# Altium PCB stm32f103.PcbDoc
Units mm, origin at the board's own origin, x right, y up, seen from the top; angles counter-clockwise.
Board outline 53.38 x 22.71 mm, 2 copper layers (Top Layer, Bottom Layer); 35 components, 50 nets, 173 pads, 37 vias.
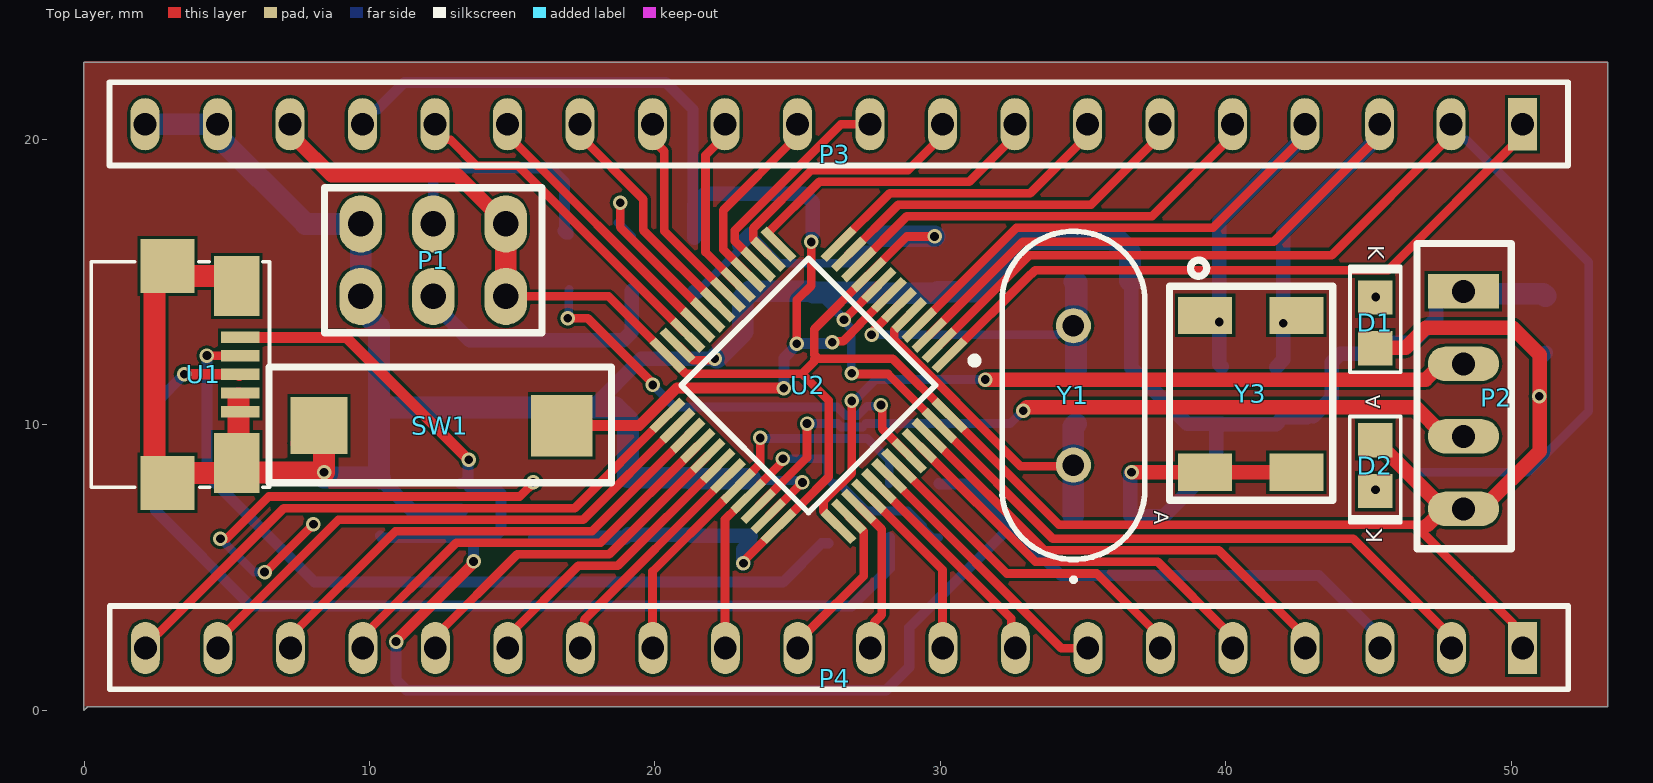
[diagram p0: Top Layer view]
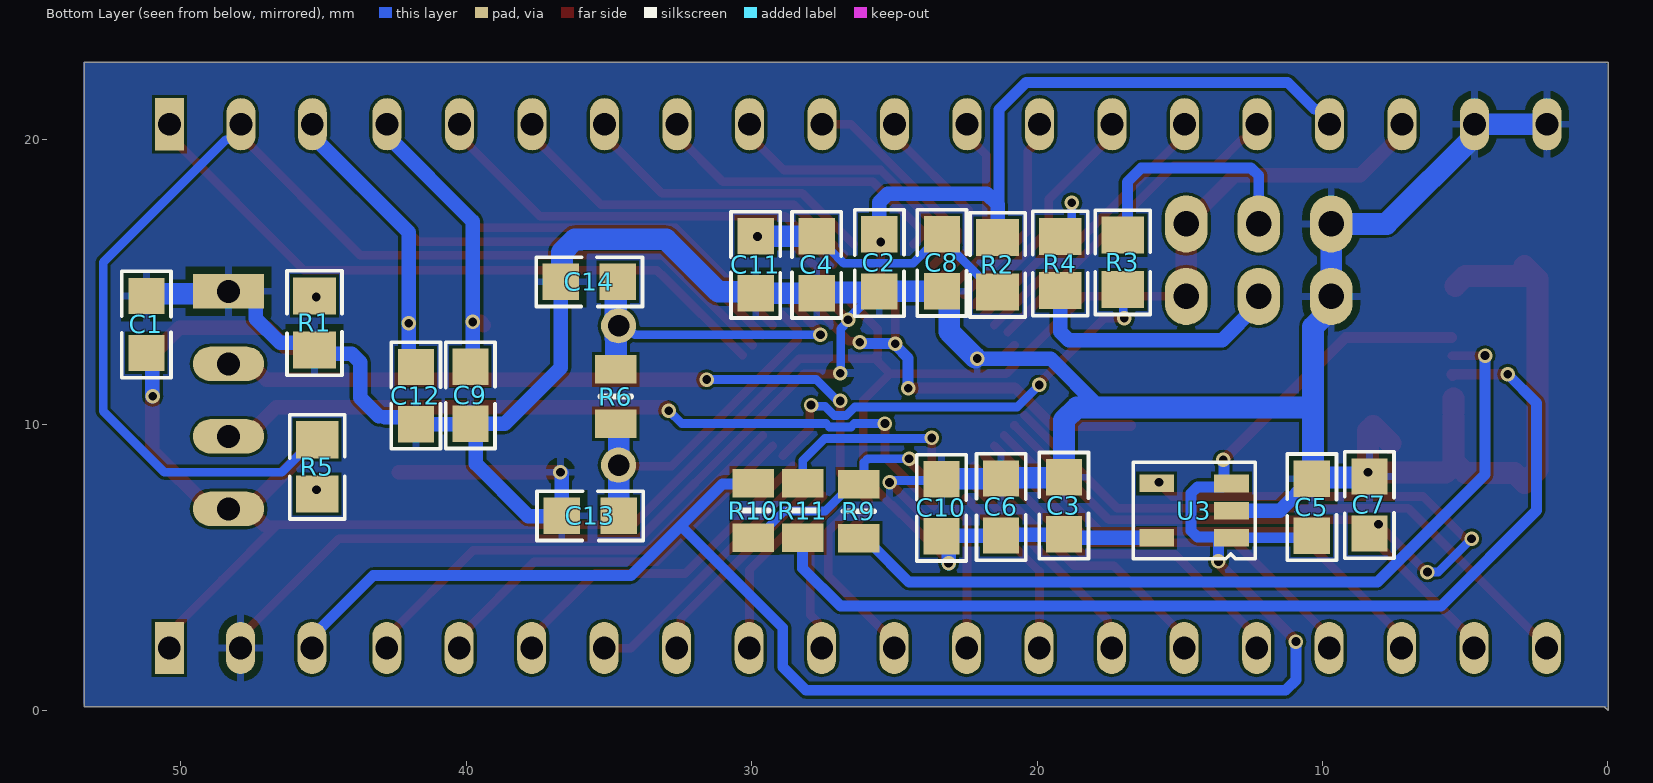
[diagram p1: Bottom Layer view, seen from below]
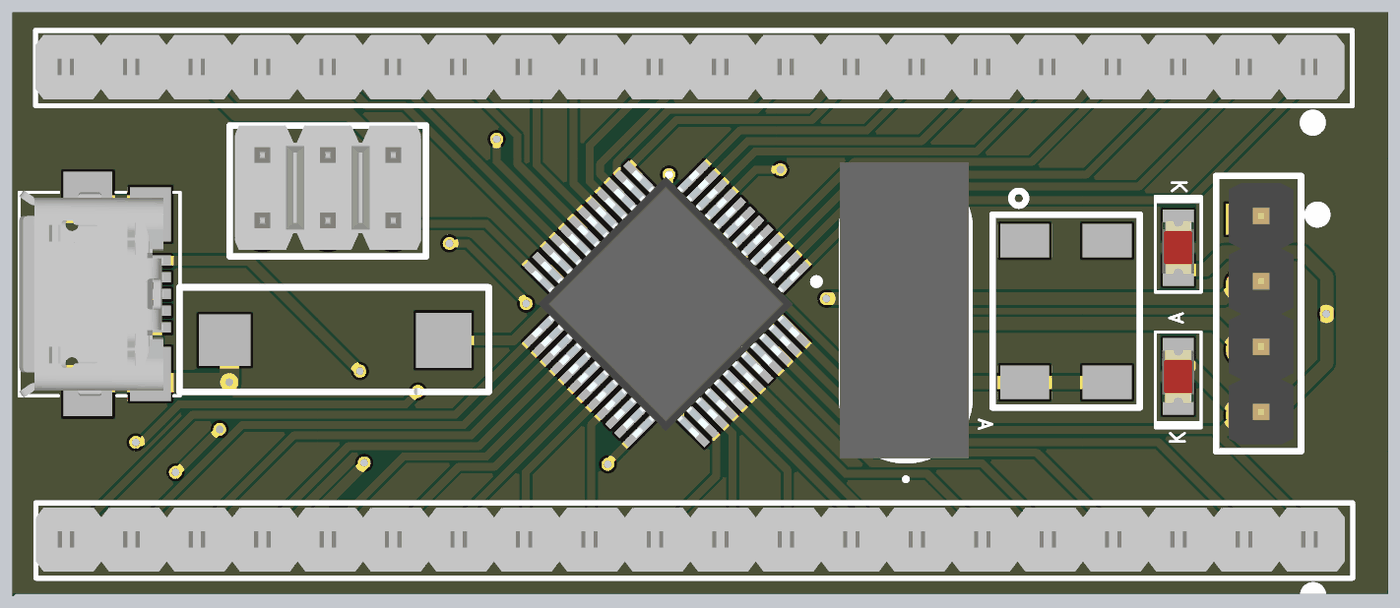
[diagram p2: 3D render of the assembled board from above, using the file's embedded part models]
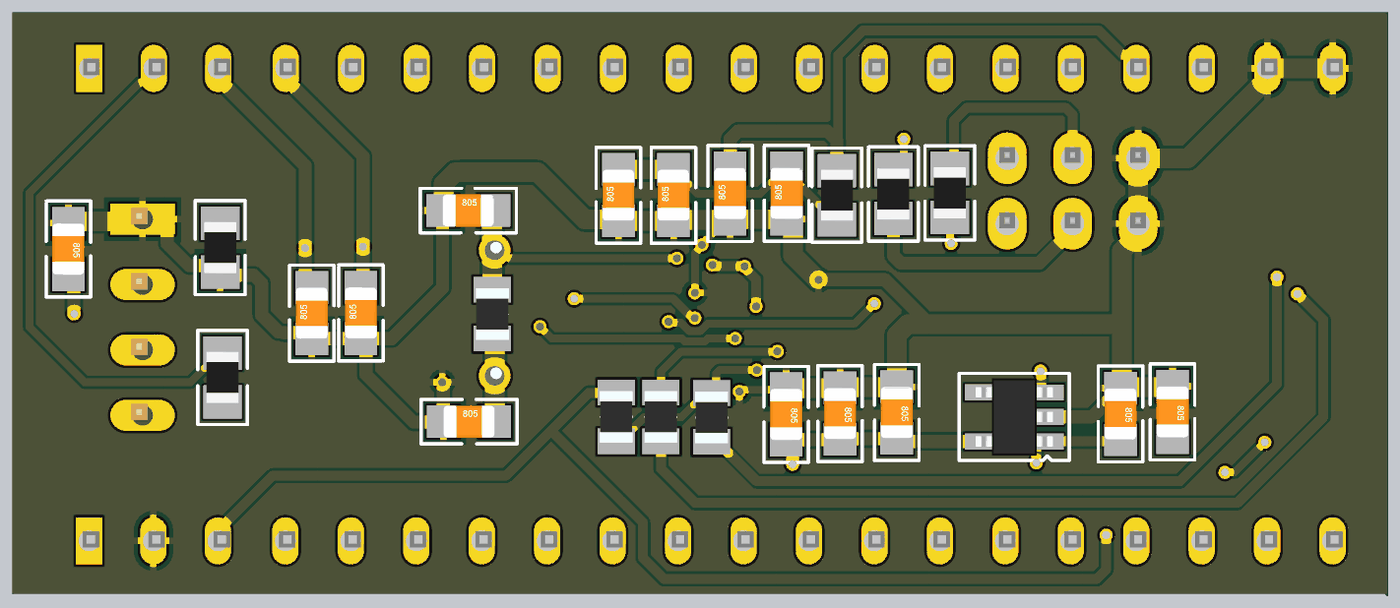
[diagram p3: 3D render of the assembled board from below, using the file's embedded part models]

## Layer stack, top to bottom
Top Solder: solder mask 0.0102, Solder Resist, Dk 3.5
Top Layer: signal copper 0.0356
Dielectric 1: dielectric 0.32, FR-4, Dk 4.8
Bottom Layer: signal copper 0.0356
Bottom Solder: solder mask 0.0102, Solder Resist, Dk 3.5

## Board outline
0,0 0.126,0.126 53.378,0.126 53.378,22.711 53.377,22.711 -0.005,22.711 -0.005,0.005

## Design rules (kind name [scope] priority, off if disabled: settings)
Clearance [All] p1: gap=0.1 ignorepadtopadclearanceinfootprint=TRUE
PolygonConnect [All] p1: connectstyle=Relief reliefconductorwidth=0.254 reliefentries=4 polygonreliefangle="90 Angle" airgapwidth=0.254
RoutingVias [All] p1: holewidth=0.305 width=0.508 viastyle="Through Hole" minholewidth=0.305 minwidth=0.508 maxholewidth=0.508 maxwidth=0.762
SolderMaskExpansion [All] p1: expansion=0.102 istentingtop=FALSE
Width [All] p1: maxlimit=0.762 minlimit=0.305 preferedwidth=0.381
30 further rules are at their usual default settings.

## Components (designator, comment, footprint, x,y, rotation, side; value= is the part's Value field where it differs from the comment)
C1 "104,0805" CAP_0805 51.208,13.521 r270 bottom
C2 "105,0805" CAP_0805 25.527,15.678 r90 bottom
C3 "104,0805" CAP_0805 19.06,7.171 r270 bottom
C4 "104,0805" CAP_0805 27.723,15.61 r90 bottom
C5 "105,0805" CAP_0805 10.375,7.116 r270 bottom
C6 "106,0805" CAP_0805 21.261,7.127 r270 bottom
C7 "223,0805" CAP_0805 8.358,7.195 r270 bottom
C8 "104,0805" CAP_0805 23.336,15.681 r90 bottom
C9 "22p,0805" CAP_0805 39.855,11.037 r90 bottom
C10 "104,0805" CAP_0805 23.351,7.098 r270 bottom
C11 "104,0805" CAP_0805 29.862,15.61 r90 bottom
C12 "22pF" CAP_0805 41.765,11.027 r90 bottom
C13 "22p,0805" CAP_0805 35.658,6.816 r180 bottom
C14 "22p,0805" CAP_0805 35.689,15.013 r180 bottom
D1 "RED LED" LED_0805 45.241,13.573 r270 top
D2 "RED LED" LED_0805 45.238,8.571 r90 top
P1 "2X3 Berg Strip" CON6_100_59D78_TH_ST_Duplicate 14.775,17.043 r180 top
P2 "4X1 Bergstrip" CON4_100_40D72_TH_ST_MALE 48.33,14.68 r0 top
P3 "20X1 Bergstrip" CON20_100_40D72_TH_ST 50.395,20.535 r270 top
P4 "20X1 Bergstrip" CON20_100_40D72_TH_ST 50.406,2.185 r270 top
R1 "102,0805" RES_0805 45.317,13.573 r90 bottom
R2 "103,0805" RES_0805 21.386,15.61 r90 bottom
R3 "104,0805" RES_0805 16.998,15.698 r270 bottom
R4 "104,0805" RES_0805 19.191,15.654 r270 bottom
R5 "102,0805" RES_0805 45.224,8.533 r270 bottom
R6 "1M,0805" RESC2013X65N 34.756,10.995 r270 bottom
R9 "22R,0805" RESC2013X65N 26.248,6.979 r90 bottom
R10 "4.7K,0805" RESC2013X65N 29.947,7.002 r90 bottom
R11 "22R,0805" RESC2013X65N 28.214,7 r90 bottom
SW1 "TACT SWITCH" SW_342_SMD 8.23,9.974 r180 top
U1 "MICRO USB2.0" CON_10118192-0001LF_SMD 4.198,11.769 r270 top
U2 "STM32F103C8T6" QFP50P900X900X160-48N 25.381,11.387 r225 top
U3 "RT9193-33GB" SOT23-5 14.5,7 r90 bottom
Y1 "8.000 MHz" HC-49S_1 34.665,11.035 r90 top
Y3 "32.768KHz" "XTAL_MC-405 32.7680K-G3" 42.476,13.841 r270 top

## Footprints (in the part's own frame and the unit in brackets; to place one, negate y for a bottom-side part, rotate by r counter-clockwise, add the part's x,y. Pads: shape width x height; smd on the part's side, far side on the other; paste and mask are expansions set on the pad)
CAP_0805 [mm] "Ceramic Capacitor"
  rect 1.27x1.27 smd mask+0.076: 1(-1,0) 2(1,0)
  silkscreen extent -1.86,-0.86 1.86,0.86, body extent -1,-0.62 1,0.63, height 0.78
CON4_100_40D72_TH_ST_MALE [mm] "Berg Strip"
  rect 2.5x1.2 hole 0.8: 1(0,0)
  oval 2.5x1.2 hole 0.8: 2(0,-2.54) 3(0,-5.08) 4(0,-7.62)
  round 1.016 on Top Overlay: ""(2.311,0.178)
  silkscreen extent -1.63,-9.02 1.68,1.68, body extent -1.14,-8.76 1.4,1.4, height 8.55
CON6_100_59D78_TH_ST_Duplicate [mm] "Berg strip"
  oval 1.5x2 hole 0.9: 1(0,0) 2(0,2.54) 3(2.54,0) 4(2.54,2.54) 5(5.08,0) 6(5.08,2.54)
  silkscreen extent -1.27,-1.27 6.35,3.81, body extent -1.07,-1.27 6.15,3.56, height 8.18
CON20_100_40D72_TH_ST [mil] "Berg strip"
  rect 72x40 hole 31.5: 1(0,0)
  oval 72x40 hole 31.5: 2(0,-98.43) 3(0,-196.85) 4(0,-300) 5(0,-400) 6(0,-500) 7(0,-600) 8(0,-700) 9(0,-800) 10(0,-900) 11(0,-1000) 12(0,-1100) 13(0,-1200) 14(0,-1300) 15(0,-1400) 16(0,-1500) 17(0,-1600) 18(0,-1700) 19(0,-1800) 20(0,-1900)
  round 40 on Top Overlay: ""(83,2.57)
  silkscreen extent -58,-1949 57,63, body extent -51,-1949 47,51, height 323
CON_10118192-0001LF_SMD [mm] "USB2.0 MICRO"
  rect 0.4x1.35 smd: 1(-1.3,1.275) 2(-0.65,1.275) 3(0,1.275) 4(0.65,1.275) 5(1.3,1.275)
  rect 2.1x1.6 smd: 6(-3.1,1.15) 7(3.1,1.15)
  rect 1.9x1.9 smd: 8(-3.8,-1.275) 9(3.8,-1.275)
  silkscreen extent -3.95,-3.94 3.95,2.3, body extent -4.04,-3.94 4.04,1.66, height 2.81
HC-49S_1 [mm]
  round 1.23 hole 0.755: 1(-2.44,0) 2(2.44,0)
  silkscreen extent -6.51,-2.5 5.75,2.5, body extent -5.65,-2.45 5.85,2.55, height 3.6
LED_0805 [mm] "LED"
  rect 1.2x1.2 smd mask+0.076: A(0.889,0) K(-0.889,0)
  silkscreen extent -1.99,-0.89 1.73,0.89, body extent -1.01,-0.62 1.01,0.63, height 1.1
QFP50P900X900X160-48N [mm]
  rect 1.475x0.3 smd: 1(-4.238,2.75) 2(-4.238,2.25) 3(-4.238,1.75) 4(-4.238,1.25) 5(-4.238,0.75) 6(-4.238,0.25) 7(-4.238,-0.25) 8(-4.238,-0.75) 9(-4.238,-1.25) 10(-4.238,-1.75) 11(-4.238,-2.25) 12(-4.238,-2.75) 25(4.238,-2.75) 26(4.238,-2.25) 27(4.238,-1.75) 28(4.238,-1.25) 29(4.238,-0.75) 30(4.238,-0.25) 31(4.238,0.25) 32(4.238,0.75) 33(4.238,1.25) 34(4.238,1.75) 35(4.238,2.25) 36(4.238,2.75)
  rect 0.3x1.475 smd: 13(-2.75,-4.238) 14(-2.25,-4.238) 15(-1.75,-4.238) 16(-1.25,-4.238) 17(-0.75,-4.238) 18(-0.25,-4.238) 19(0.25,-4.238) 20(0.75,-4.238) 21(1.25,-4.238) 22(1.75,-4.238) 23(2.25,-4.238) 24(2.75,-4.238) 37(2.75,4.238) 38(2.25,4.238) 39(1.75,4.238) 40(1.25,4.238) 41(0.75,4.238) 42(0.25,4.238) 43(-0.25,4.238) 44(-0.75,4.238) 45(-1.25,4.238) 46(-1.75,4.238) 47(-2.25,4.238) 48(-2.75,4.238)
  silkscreen extent -4.85,-3.15 3.15,3.62, body extent -4.47,-4.52 4.53,4.48, height 1.6
RES_0805 [mm] "Resister"
  rect 1.3x1.5 smd mask+0.076: 1(0.95,0) 2(-0.95,0)
  silkscreen extent -1.83,-0.97 1.83,0.97, body extent -1,-0.63 1,0.62, height 0.5
RESC2013X65N [mm]
  rect 1x1.45 smd: 1(-0.95,0) 2(0.95,0)
  silkscreen extent 0,-0.54 0,0.54, body extent -1,-0.64 1,0.64, height 0.65
SOT23-5 [mm] "CASE: SOT"
  rect 0.62x1.22 smd mask+0.076: 1(-0.953,-1.31) 2(-0.003,-1.31) 3(0.947,-1.31) 4(0.952,1.31) 5(-0.953,1.31)
  silkscreen extent -1.69,-2.14 1.69,2.14, body extent -1.5,-1.5 1.5,1.5, height 1.41
SW_342_SMD [mm] "CASE: SMD"
  rect 2x2 smd: 1(0,0)
  rect 2.15x2.15 smd: 2(-8.5,0)
  silkscreen extent -10.25,-2.06 1.75,2, body extent -7.17,-1.79 -1.17,1.71, height 2.4
"XTAL_MC-405 32.7680K-G3" [mm] "Crystal"
  rect 1.3x1.9 smd: 1(0,-3.2) 2(5.5,-3.2) 3(5.5,0) 4(0,0)
  silkscreen extent -1.93,-4.44 6.48,1.27, body extent -1.02,-4.44 6.48,1.27, height 3.6

## Part data
C1 C3 C4 C7 C8 C10 C11: library part CAP_0.1uF-50V-5%-0805, "0.1µF ±5% 50V Ceramic Capacitor X7R 0805 (2012 Metric)", Case/Package="0805 (2012 Metric)", Manufacturer=KEMET, Manufacturing Part Number=C0805C104J5RACTU, Supplier Part Number-1=399-1171-1-ND, Supplier-1=Digikey
C2 C5: library part CAP_1uF-50V-5%-0805, "1µF ±5% 50V Ceramic Capacitor X7R 0805 (2012 Metric)", Case/Package="0805 (2012 Metric)", Manufacturer=Yageo, Manufacturing Part Number=CC0805JKX7R9BB105, Supplier Part Number-1=311-3498-1-ND, Supplier-1=Digikey
C6: library part CAP_1uF-50V-5%-0805, "10µF ±5% 50V Ceramic Capacitor X7R 0805 (2012 Metric)", Case/Package="0805 (2012 Metric)", Manufacturer=Yageo, Manufacturing Part Number=CC0805JKX7R9BB105, Supplier Part Number-1=311-3498-1-ND, Supplier-1=Digikey
C9 C12 C13 C14: library part CAP_22pF-50V-5%-0805, "22pF ±5% 50V Ceramic Capacitor C0G, NP0 0805 (2012 Metric)", Case/Package=0805, Manufacturer=KEMET, Manufacturer Part Number=C0805C220J5GACTU, Supplier Part Number-1=399-1113-1-ND, Supplier-1=Digikey
D1 D2: library part LED-RED_10mA-0805, "Red 621nm LED Indication - Discrete 2V 0805 (2012 Metric)", Case/ Package=0805, Manufacturer="Lite-On Inc.", Manufacturer Part Number=LTST-C170EKT, Supplier Part Number-1=160-1178-1-ND, Supplier-1=Digikey
P1: library part CON-BS-PLG_2X3-100-TH-ST, "6 pin, 2 row, 2.54mm pitch bergstrip", Case/Package=TH, Manufacturer=NA, Manufacturer Part Number=NA, Supplier Part Number-1=NA, Supplier-1=NA
P2: library part CON-BS-PLG_4X1-100-TH-ST, "4 pin, 1 row, 2.54mm pitch bergstrip", Case/Package=TH, Manufacturer=NA, Manufacturing Part Number=NA, Supplier Part Number-1=NA, Supplier-1=NA
P3 P4: library part CON-BS-PLG_20X1-100-TH-ST, "20 pin, 1 row, 2.54mm pitch bergstrip", Case/Package=TH, Manufacturer=NA, Manufacturing Part Number=NA, Supplier Part Number-1=NA, Supplier-1=NA
R1 R5: library part RES_1K-0.125W-1%-0805, "1 kOhms ±1% 0.125W, 1/8W Chip Resistor 0805 (2012 Metric) Moisture Resistant Thick Film", Case/Package=0805, Manufacturer=垈㎵á, Manufacturer Part Number=RC0805FR-071KL, Supplier Part Number-1=311-1.00KCRCT-ND, Supplier-1=Digikey
R2 R3 R4: library part RES_10K-0.125W-1%-0805, "10 kOhms ±1% 0.125W, 1/8W Chip Resistor 0805 (2012 Metric) Moisture Resistant Thick Film", Case/Package=0805, Manufacturer=Yageo, Manufacturing Part Number=RC0805FR-0710KL, Supplier Part Number-1=311-10.0KCRCT-ND, Supplier-1=Digikey
R6: library part CRGS0805J1M0, "TE Connectivity CRGS Series Thick Film Anti-surge Resistor 0805 Case 1M +/-5% 0.5W +/-100ppm/C", Manufacturer_Name="TE Connectivity", RS Part Number=9059767, Datasheet Link=http://www.te.com/commerce/DocumentDelivery/DDEController?Action=showdoc&DocId=Data+Sheet%7F9-1773463-8%7FB%7Fpdf%7FEnglish%7FENG_DS_9-1773463-8_B.pdf%7F3-2176243-7, Geometry.Height=0.65mm, Manufacturer_Part_Number=CRGS0805J1M0, RS Price/Stock=https://uk.rs-online.com/web/p/products/9059767
R9 R11: library part CRGH0805J22R, "TE Connectivity Thick Film Surface Mount Fixed Resistor 0805 Case 22 +/-5% 0.33W +/-200ppm/C", Manufacturer_Name="TE Connectivity", Mouser Part Number=279-CRGH0805J22R, RS Part Number=8075740, Datasheet Link=http://docs-europe.electrocomponents.com/webdocs/12d7/0900766b812d7379.pdf, Geometry.Height=0.65mm, Manufacturer_Part_Number=CRGH0805J22R, Mouser Price/Stock=https://www.mouser.com/Search/Refine.aspx?Keyword=279-CRGH0805J22R, RS Price/Stock=https://uk.rs-online.com/web/p/products/8075740
R10: library part ERJ-6GEYJ472V, "RESISTOR, 0805 4.7K Ohm +/-5% 0.125 W", Manufacturer_Name=Panasonic, Mouser Part Number=667-ERJ-6GEYJ472V, Allied Price/Stock=https://www.alliedelec.com/panasonic-erj-6geyj472v/70266150/, Allied_Number=70266150, Manufacturer_Part_Number=ERJ-6GEYJ472V, Mouser Price/Stock=https://www.mouser.com/Search/Refine.aspx?Keyword=667-ERJ-6GEYJ472V
SW1: library part SW_KSR223GLFG-SMD, "Tactile Switch SPST-NO Top Actuated Surface Mount", Case/Package=SMD, Manufacturer=C&K, Manufacturing Part Number=KSR223GLFG, Supplier Part Number-1=401-1704-1-ND, Supplier-1=Digikey
U1: library part CON-USB_10118192-0002LF-SMD, "USB - micro B USB 2.0 Receptacle Connector 5 Position Surface Mount, Right Angle", Case/Package=SMD, Manufacturer="Amphenol ICC (FCI)", Manufacturing Part Number=10118192-0002LF, Supplier Part Number-1=609-5379-1-ND, Supplier-1=Digikey
U2: "STM32F103C8T6, 32 bit ARM Cortex M3 Microcontroller 72MHz 64kb Flash, 20kb RAM, USB I2C SPI 48-Pin LQFP", Manufacturer_Name=STMicroelectronics, Mouser Part Number=511-STM32F103C8T6, RS Part Number=0402279P, Allied Price/Stock=http://www.alliedelec.com/stmicroelectronics-stm32f103c8t6/70390993/, Allied_Number=70390993, Datasheet Link=http://www.st.com/st-web-ui/static/active/en/resource/technical/document/datasheet/CD00161566.pdf, Geometry.Height=1.6mm, Manufacturer_Part_Number=STM32F103C8T6, Mouser Price/Stock=https://www.mouser.com/Search/Refine.aspx?Keyword=511-STM32F103C8T6, RS Price/Stock=http://uk.rs-online.com/web/p/products/0402279P
U3: library part REG_3.3V-5.5V-0.3A-SOT-23-5, "Linear Voltage Regulator IC 1 Output 300mA SOT-23-5", Case/ Package=SOT-23-5, Manufacturer="Richtek USA Inc.", Supplier Part Number-1=1028-1014-1-ND, Manufacturer Part Number=RT9193-33GB, Supplier-1=Digikey
Y1: library part 9B-16.000MEEJ-B, "TXC - 9B-16.000MEEJ-B - XTAL, 16.000MHZ, 18PF, HC-49S", Manufacturer_Name=TXC, Mouser Part Number=717-9B-16.000MEEJ-B, Datasheet Link=http://www.txccrystal.com/images/pdf/9b-accuracy.pdf, Manufacturer_Part_Number=9B-16.000MEEJ-B, Mouser Price/Stock=https://www.mouser.com/Search/Refine.aspx?Keyword=717-9B-16.000MEEJ-B
Y3: library part "XTAL_32.768KHz-MC-405 32.7680K-G3", "Crystals SMD AT XTL MHZ +/-50PPM 12.5 PF 250 T/R", Case/Package=SMD, Manufacturer=Epson, Manufacturing Part Number="MC-405 32.7680K-G3: ROHS", Supplier Part Number-1=732-MC405327680KG3RS, Supplier-1=Mouser

## Via types
v1: diameter 0.508, hole 0.305, Top Layer to Bottom Layer, 37 vias

## Nets (pads, with @x,y where several pads share a name; then routed paths per layer and width w, separated by ;. In a path a pad name is that pad's centre, name@x,y a point inside that pad or via, vN(x,y) a via of type N, cw(c..) or ccw(c..) an arc to the next point about the centre after c; other vN are vias at no path point)
5V: C5.2 P4.3 R10.2 U1.1 U3.1 U3.3 | length 66.7
  Top Layer w0.381: U1.1 9.185,13.069 v1(13.477,8.777) ; v1(10.932,2.409) 10.932,2.44 13.644,5.153 v1(13.644,5.216)
  Bottom Layer w0.381: C5.2 10.444,6.047 U3.1 13.483,6.047 13.644,5.886 v1(13.644,5.216) ; v1(10.932,2.409) 10.932,1.068 11.294,0.706 28.097,0.706 28.911,1.52 28.911,2.892 32.486,6.467 ; U3.3 U3.3@13.49,7.947 ; U3.3@13.416,8.111 13.453,8.148 13.453,8.752 v1(13.477,8.777) ; U3.3@13.49,7.828 14.383,7.828 14.606,7.605 14.606,6.294 14.383,6.07 U3.1@13.602,6.07 ; R10.2 29.966,7.932 31.02,7.932 32.564,6.389 34.231,4.722 43.258,4.722 45.397,2.584 P4.3@45.397,2.177
BOOT0: R3.1 U2.44 | length 15.5
  Top Layer w0.305: v1(16.947,13.738) 17.651,13.738 v1@19.838,11.551 ; v1@27.961,10.608 27.957,10.604 27.957,10.515 27.963,10.509 27.963,9.869 28.908,8.924 U2.44
  Bottom Layer w0.305: v1@16.986,13.738 16.986,14.737 R3.1 ; v1(19.929,11.399) 20.699,10.629 26.393,10.629 26.689,10.333 27.108,10.333 27.433,10.659 27.88,10.659 v1(27.918,10.698)
BOOT1: R4.2 U2.20 | length 6.6
  Top Layer w0.305: v1(18.786,17.787) 18.786,16.921 U2.20
  Bottom Layer w0.305: v1(18.786,17.787) 18.786,17.166 18.708,17.087 R4.2
BP: C7.2 U3.4 | length 16.6
  Top Layer w0.305: v1(4.776,6.012) 4.993,6.012 6.47,7.49 15.267,7.49 15.805,8.028 v1@15.805,7.918 ; v1(6.323,4.846) 6.365,4.846 v1(8.035,6.516)
  Bottom Layer w0.305: v1(4.776,6.012) 5.943,4.846 v1(6.323,4.846) ; v1(15.731,7.99) 15.841,7.99 15.844,7.987 U3.4
GND: C1.1 C2.1 C3.1 C4.1 C5.1 C6.1 C7.1 C8.1 C9.1 C10.1 C11.1 C12.1 C13.1 C14.1 P1.5 P1.6 P2.1 P3.19 P3.20 P4.2 R1.2 SW1.1 U1.4 U1.5 U1.6 U1.7 U1.8 U1.9 U2.8 U2.23 U2.35 U2.47 U3.2 Y3.2 Y3.3 | length 152.3
  Top Layer w0.305: U2.23 20.796,12.793 21.323,12.266 21.983,12.266 22.004,12.288 v1@22.13,12.288 ; U2.35 23.975,6.802 25.03,7.856 25.157,7.984 v1(25.169,7.984) ; v1(26.623,13.681) 26.623,13.687 27.847,14.911 U2.8 ; v1(26.896,11.816) 26.926,11.786 28.164,11.786 U2.47 33.939,6.011 44.47,6.011 47.897,2.584 P4.2@47.897,2.177
  Top Layer w0.508: v1(36.701,8.345) 36.706,8.341 Y3.3@42.361,8.341
  Top Layer w0.762: U1.8@2.923,15.219 4.998,15.219 U1.6 ; U1.8 2.464,15.109 2.464,8.429 U1.9 3.273,8.319 4.998,8.319 U1.7 ; U1.5@5.411,10.288 5.411,8.732 U1.7 ; U1.5@5.411,10.469 U1.4@5.411,10.938 ; SW1.1@7.611,9.355 SW1.1 8.409,9.795 v1(8.409,8.344) ; v1@8.376,8.333 5.684,8.333 U1.7
  Bottom Layer w0.305: C10.1@23.506,8.051 25.102,8.051 v1(25.169,7.984) ; C2.1@26.014,14.644 26.014,14.318 v1@26.611,13.72 ; v1(26.623,13.681) 26.623,13.708 v1@26.611,13.72 ; v1(26.896,11.816) 26.881,11.831 26.881,13.369 26.611,13.638 v1@26.611,13.72
  Bottom Layer w0.508: C5.1 11.49,7.001 13.186,7.001 U3.2 ; 17.798,10.609 19.516,12.327 v1(22.098,12.327) ; C2.1 C2.1@25.559,14.646 ; C14.1 36.689,12.001 38.653,10.037 39.66,10.037 C9.1 39.855,10.027 39.66,9.832 39.66,8.64 37.822,6.802 36.672,6.802 C13.1 36.658,8.302 v1(36.701,8.345) ; C9.1@39.86,10.032 41.76,10.032 C12.1 42.002,10.265 42.859,10.265 ; 43.063,10.302 43.713,10.952 43.713,12.202 44.011,12.5 45.194,12.5 R1.2 45.57,12.876 46.526,12.876 47.374,13.724 47.374,14.334 47.72,14.68 P2.1 ; P2.1@47.682,14.642 P2.1@48.367,14.642
  Bottom Layer w0.762: P3.20 P3.19 ; P3.19@4.615,20.188 7.76,17.043 P1.5 P1.6 9.695,14.074 10.331,13.438 10.331,10.609 ; C7.1 8.397,8.155 C5.1@10.331,8.155 ; C5.1 10.336,8.155 C5.1@10.331,8.155 ; C3.1 19.06,10.162 18.614,10.609 17.798,10.609 10.331,10.609 ; C3.1@19.136,8.149 21.214,8.149 21.251,8.112 C10.1@23.337,8.112 ; v1@22.171,12.358 23.082,13.27 23.082,14.427 C8.1 23.338,14.679 25.525,14.679 C2.1 ; C2.1@25.559,14.646 25.56,14.644 26.014,14.644 27.722,14.644 27.756,14.61 C11.1 29.919,14.668 31.167,14.668 33.003,16.504 35.989,16.504 35.993,16.5 36.2,16.5 36.646,16.054 36.646,15.056 C14.1 ; P2.1 48.367,14.642 48.409,14.6 51.128,14.6 C1.1 ; C5.1@10.331,8.155 10.331,10.609
NET3: P1.3 R3.2 | length 8.8
  Bottom Layer w0.305: R3.2@16.888,16.757 R3.2
  Bottom Layer w0.381: P1.3 12.235,18.735 12.5,19 16.352,19 16.839,18.514 R3.2@16.839,16.807
  Bottom Layer w0.508: P1.3 P1.3@12.425,17.233 ; R3.2@16.839,16.807 R3.2@16.888,16.757
NET4: P1.4 R4.1 | length 9.3
  Bottom Layer w0.508: P1.4@12.32,14.419 12.32,14.169 13.519,12.969 18.894,12.969 19.191,13.267 R4.1
  Bottom Layer w0.762: P1.4 P1.4@12.32,14.419
NetD1_K: D1.K R1.1
  other v1: 45.254,14.479
NetD2_K: D2.K R5.1
  other v1: 45.249,7.726
NetR9_1: R9.1 U1.2 | length 29.2
  Top Layer w0.305: v1(4.305,12.43) 4.311,12.425 5.468,12.425 U1.2
  Bottom Layer w0.381: v1(4.305,12.43) 4.305,8.263 8.068,4.501 24.494,4.501 25.847,5.853 R9.1@26.072,5.853
NetR11_1: R11.1 U1.3 | length 35.9
  Top Layer w0.381: v1(3.51,11.775) 5.39,11.775 5.435,11.731 U1.3
  Bottom Layer w0.381: v1(3.51,11.775) 2.5,10.766 2.5,7 5.842,3.658 26.893,3.658 28.214,4.979 R11.1
OSCIN: C13.2 R6.2 U2.5 Y1.1 | length 12.5
  Top Layer w0.305: U2.5 28.908,13.85 28.381,13.324 28.381,12.98 32.807,8.555 34.498,8.555 Y1.1@34.612,8.441
  Bottom Layer w0.762: C13.2 34.658,8.551 34.658,9.947 R6.2
OSCOUT: C14.2 R6.1 U2.6 Y1.2 | length 13.3
  Top Layer w0.305: v1(27.591,13.16) 27.63,13.199 27.63,13.283 U2.6
  Bottom Layer w0.305: v1(27.591,13.16) 34.1,13.16 34.415,13.475 Y1.2
  Bottom Layer w0.762: C14.2 34.756,14.946 Y1.2@34.756,13.431 ; R6.1 Y1.2@34.756,13 ; Y1.2@34.776,13.044 34.776,13.431 C14.2@34.776,14.99
PA0: P3.5 U2.10 | length 15.4
  Top Layer w0.305: U2.10 28.828,17.31 37.416,17.31 40.235,20.128 P3.5
PA1: P3.6 U2.11 | length 13
  Top Layer w0.305: U2.11 28.526,17.715 35.281,17.715 37.695,20.128 P3.6
PA2: P3.7 U2.12 | length 10.7
  Top Layer w0.305: U2.12 28.224,18.12 33.146,18.12 35.155,20.128 P3.7
PA3: P3.8 U2.13 | length 10.6
  Top Layer w0.305: U2.13 23.946,16.711 23.946,16.715 25.756,18.525 31.011,18.525 P3.8@32.615,20.128
PA4: P3.9 U2.14 | length 9.5
  Top Layer w0.305: U2.14 23.975,15.978 23.448,16.505 23.448,16.894 25.484,18.929 28.876,18.929 30.075,20.128 P3.9
PA5: P3.10 U2.15 | length 7.8
  Top Layer w0.305: U2.15 22.796,16.447 22.796,16.814 26.517,20.535 P3.10
PA6: P3.11 U2.16 | length 6.5
  Top Layer w0.305: U2.16 22.391,16.144 22.391,17.525 24.905,20.039 P3.11@24.905,20.33
PA7: P3.12 U2.17 | length 6.4
  Top Layer w0.305: P3.12 22.455,20.128 21.772,19.446 21.772,16.056 U2.17
PA8: P4.16 U2.29 | length 12.6
  Top Layer w0.305: P4.16@12.297,2.177 12.297,2.584 15.178,5.466 18.398,5.466 U2.29
PA9: P4.15 U2.30 | length 10.3
  Top Layer w0.305: P4.15@14.837,2.177 14.837,2.584 17.314,5.061 18.701,5.061 U2.30
PA10: P4.14 U2.31 | length 8.2
  Top Layer w0.305: P4.14 17.522,2.321 17.522,3.175 U2.31
PA11: P4.13 R11.2 U2.32 | length 13.4
  Top Layer w0.305: P4.13@19.917,2.177 19.917,4.863 U2.32@22.5,7.446 ; U2.32@23.326,8.276 23.696,8.645 v1(23.696,9.545)
  Bottom Layer w0.305: v1(23.696,9.545) 23.717,9.524 27.443,9.524 28.214,8.753 R11.2
PA12: P4.12 R9.2 R10.1 U2.33 | length 13.3
  Top Layer w0.305: P4.12@22.457,2.177 22.457,6.692 U2.33@22.856,7.091 ; U2.33@23.681,7.92 24.487,8.725 v1(24.487,8.818)
  Bottom Layer w0.305: v1(24.487,8.818) 25.932,8.818 26.068,8.683 26.068,8.109 R9.2 26.473,7.929 27.418,6.984 28.863,6.984 29.192,6.655 29.374,6.473 29.374,6.399 29.722,6.052 R10.1
PA15: P4.11 U2.38 | length 5.8
  Top Layer w0.305: P4.11 25.006,2.399 25.48,2.873 27.313,4.706 27.313,6.27 26.786,6.796 U2.38
PB0: P3.13 U2.18 | length 7.1
  Top Layer w0.305: P3.13 19.915,20.007 20.327,19.594 20.327,16.794 U2.18
PB1: P3.14 U2.19 | length 8.3
  Top Layer w0.305: P3.14 17.375,20.128 19.595,17.908 19.595,16.819 U2.19
PB3: P4.10 U2.39 | length 5.5
  Top Layer w0.305: U2.39 27.14,7.15 27.945,6.344 27.945,3.354 27.682,3.091 27.682,2.321 P4.10
PB4: P4.9 U2.40 | length 6.2
  Top Layer w0.305: U2.40 30.077,4.923 P4.9@30.077,2.391
PB5: P4.8 U2.41 | length 8.1
  Top Layer w0.305: U2.41 32.49,3.217 32.49,2.304 P4.8@32.617,2.177 ; P4.8@32.626,2.321 P4.8@32.626,2.784
PB6: P4.7 U2.42 | length 9.5
  Top Layer w0.305: U2.42 34.237,2.177 P4.7@35.157,2.177
PB7: P4.6 U2.43 | length 12
  Top Layer w0.305: U2.43 32.325,4.796 35.484,4.796 37.697,2.584 P4.6@37.697,2.177
PB8: P4.5 U2.45 | length 14
  Top Layer w0.305: U2.45 33.334,5.201 37.619,5.201 40.115,2.705 P4.5@40.115,2.299
PB9: P4.4 U2.46 | length 16.5
  Top Layer w0.305: U2.46 33.637,5.606 39.755,5.606 42.777,2.584 P4.4@42.777,2.177
PB10: P3.15 U2.21 | length 9.8
  Top Layer w0.305: P3.15 14.835,20.162 21.085,13.912 21.088,13.912 U2.21
PB11: P3.16 U2.22 | length 11.9
  Top Layer w0.305: P3.16 12.295,20.321 12.623,19.992 12.837,19.992 13.745,19.084 15.203,19.084 U2.22@21.032,13.255
PB12: P4.20 U2.25 | length 21.8
  Top Layer w0.305: P4.20 2.146,2.399 2.475,2.728 2.633,2.728 6.991,7.085 17.19,7.085 U2.25
PB13: P4.19 U2.26 | length 19.5
  Top Layer w0.305: P4.19@4.677,2.177 4.677,2.441 8.916,6.68 17.492,6.68 U2.26
PB14: P4.18 U2.27 | length 17.3
  Top Layer w0.305: P4.18@7.217,2.177 7.217,2.584 10.908,6.275 17.794,6.275 U2.27
PB15: P4.17 U2.28 | length 14.9
  Top Layer w0.305: P4.17@9.757,2.177 9.757,2.584 13.043,5.87 18.096,5.87 U2.28
PC13: P3.2 R5.2 U2.2 | length 42.4
  Top Layer w0.305: U2.2 33.123,15.947 43.714,15.947 47.895,20.128 P3.2
  Bottom Layer w0.305: R5.2 45.324,9.483 46.467,8.34 50.579,8.34 52.723,10.484 52.723,15.695 48.426,19.992 48.223,19.992 47.895,20.321 P3.2
PC14: C12.2 P3.3 U2.3 Y3.4 | length 29.1
  Top Layer w0.305: U2.3 32.884,16.416 41.682,16.416 45.395,20.128 P3.3
  Bottom Layer w0.508: C12.2 42.02,12.282 v1(42.02,13.558) 42.02,16.753 45.395,20.128 P3.3
PC15: C9.2 P3.4 U2.4 Y3.1 | length 26.9
  Top Layer w0.305: U2.4 32.666,16.905 39.551,16.905 42.775,20.128 P3.4
  Top Layer w0.508: Y3.1@39.389,13.5 39.498,13.61 v1(39.774,13.61)
  Bottom Layer w0.508: C9.2 39.774,12.118 v1(39.774,13.61) 39.774,17.128 42.775,20.128 P3.4
RESET: C2.2 P3.17 R2.1 SW1.2 U2.7 | length 40.6
  Top Layer w0.305: v1(24.967,12.842) 24.967,14.374 25.473,14.88 v1(25.473,16.412) ; v1(26.212,12.898) 26.251,12.937 26.595,12.937 27.191,13.533 27.191,13.551 U2.7
  Top Layer w0.381: SW1.2 19.452,9.974 20.768,11.29 v1(24.519,11.29)
  Bottom Layer w0.381: P3.17 9.755,20.769 10.048,21.063 10.283,21.063 11.22,22 20.385,22 21.337,21.048 21.337,17.725 ; v1(24.519,11.29) 24.519,12.349 24.967,12.797 v1(24.967,12.842) ; v1@24.973,12.837 24.991,12.855 26.169,12.855 v1(26.212,12.898)
  Bottom Layer w0.508: R2.1 21.386,17.725 21.758,18.098 25.229,18.098 25.527,17.8 C2.2
SWDCLK: P2.2 U2.37 | length 27
  Top Layer w0.305: U2.37 26.433,6.449 25.906,6.976 25.906,7.319 26.898,8.311 v1(26.898,10.84)
  Top Layer w0.508: v1(31.578,11.591) 47.002,11.591 47.551,12.14 P2.2
  Bottom Layer w0.305: v1(26.898,10.84) 26.988,10.84 27.739,11.591 v1(31.578,11.591)
SWDIO: P2.3 U2.34 | length 27.4
  Top Layer w0.305: U2.34 25.329,8.861 v1(25.329,10.047)
  Top Layer w0.508: v1(32.908,10.502) 33.034,10.627 46.652,10.627 47.68,9.6 P2.3
  Bottom Layer w0.305: v1(25.329,10.047) 26.403,10.047 26.521,9.929 27.276,9.929 27.394,10.047 32.453,10.047 v1(32.908,10.502)
VBAT: P3.1 U2.1 | length 23.7
  Top Layer w0.305: U2.1 33.164,15.282 33.183,15.282 33.321,15.42 45.686,15.42 50.395,20.128 P3.1
VCC3V3: C1.2 C3.2 C4.2 C6.2 C8.2 C10.2 C11.2 D1.A D2.A P1.1 P1.2 P2.4 P3.18 P4.1 R2.2 U2.9 U2.24 U2.36 U2.48 U3.5 | length 105.7
  Top Layer w0.305: P1.2 18.375,14.503 U2.24 20.443,12.439 21.086,11.796 25.152,11.796 ; v1(23.102,5.157) 23.102,5.219 U2.36 24.332,6.446 25.111,7.225 25.137,7.225 26.095,8.183 26.095,10.833 ; 25.581,12.322 25.581,12.225 25.152,11.796 ; 26.09,10.859 25.152,11.796 ; v1(29.799,16.602) 28.828,16.602 U2.9 25.581,13.355 25.581,12.463 25.721,12.322 28.334,12.322 U2.48 34.157,6.5 43.5,6.5 46.619,6.5 ; 47.079,6.5 46.619,6.5 ; P4.1@50.397,2.177 50.051,2.523 50.051,3.068 48.556,4.563 46.619,6.5
  Top Layer w0.508: P3.18@7.425,20.001 8.684,18.742 13.076,18.742 P1.1 ; D2.A P2.4@47.639,7.06 ; D1.A 45.261,12.704 46.306,12.704 47.007,13.405 50.053,13.405 51.003,12.456 51.003,11.001 51.003,9.083 48.98,7.06 P2.4@47.639,7.06 ; 47.073,6.494 P2.4@47.639,7.06
  Top Layer w0.762: P1.2@14.775,14.622 P1.1
  Bottom Layer w0.305: R2.2@21.486,14.661 C8.2@22.955,16.13 ; C8.2 24.351,15.666 26.779,15.666 27.241,16.128 27.478,16.128 C4.2@27.492,16.142
  Bottom Layer w0.508: U3.5 18.937,6.047 C3.2 19.082,6.149 21.261,6.149 21.298,6.112 23.337,6.112 C10.2 ; R2.2 R2.2@21.486,14.661 ; C8.2@22.955,16.3 C8.2 ; v1(23.102,5.157) 23.102,5.652 23.346,5.895 C10.2@23.299,5.943 ; v1@51,11 51,12.314 C1.2
  Bottom Layer w0.762: C4.2 C11.2@29.799,16.61
  other v1: 50.984,11.001
pads on no net: P2. P3. P4.

## Polygon pours and split planes (outlines as drawn)
GND on Bottom Layer "GND_L02_P005" (solid, pour order 5): 53.385,0.17 53.416,0.201 53.416,22.699 0.07,22.699 0.021,22.649 0.031,22.639 0.031,0.129 53.385,0.129 53.4,0.143 53.5,0.043 53.5,0
GND on Bottom Layer "GND_L02_P001" (solid, pour order 1): 58.5,5.5
no net on Top Layer "NONET_L01_P003" (solid, pour order 3): 53.33,0.126 53.36,0.156 53.36,22.738 0.02,22.738 -0.025,22.693 -0.025,0.142 53.36,0.142 53.364,0.138

## Text inside footprints (layer, text, board x,y; h text height)
D1: Top Overlay "A" at 37.5,7 h0.51 r270; Top Overlay "K" at 44.991,16.298 h0.56 r270
D2: Top Overlay "A" at 45.413,10.558 h0.51 r90; Top Overlay "K" at 45.488,5.846 h0.56 r90